# Altium PCB power.PcbDoc (part 2 of 2)
Units mil, origin at the board's own origin, x right, y up, seen from the top; angles counter-clockwise.
Board outline 6000 x 4000 mil, 2 copper layers (Top Layer, Bottom Layer); 144 components, 0 nets, 936 pads, 0 vias.
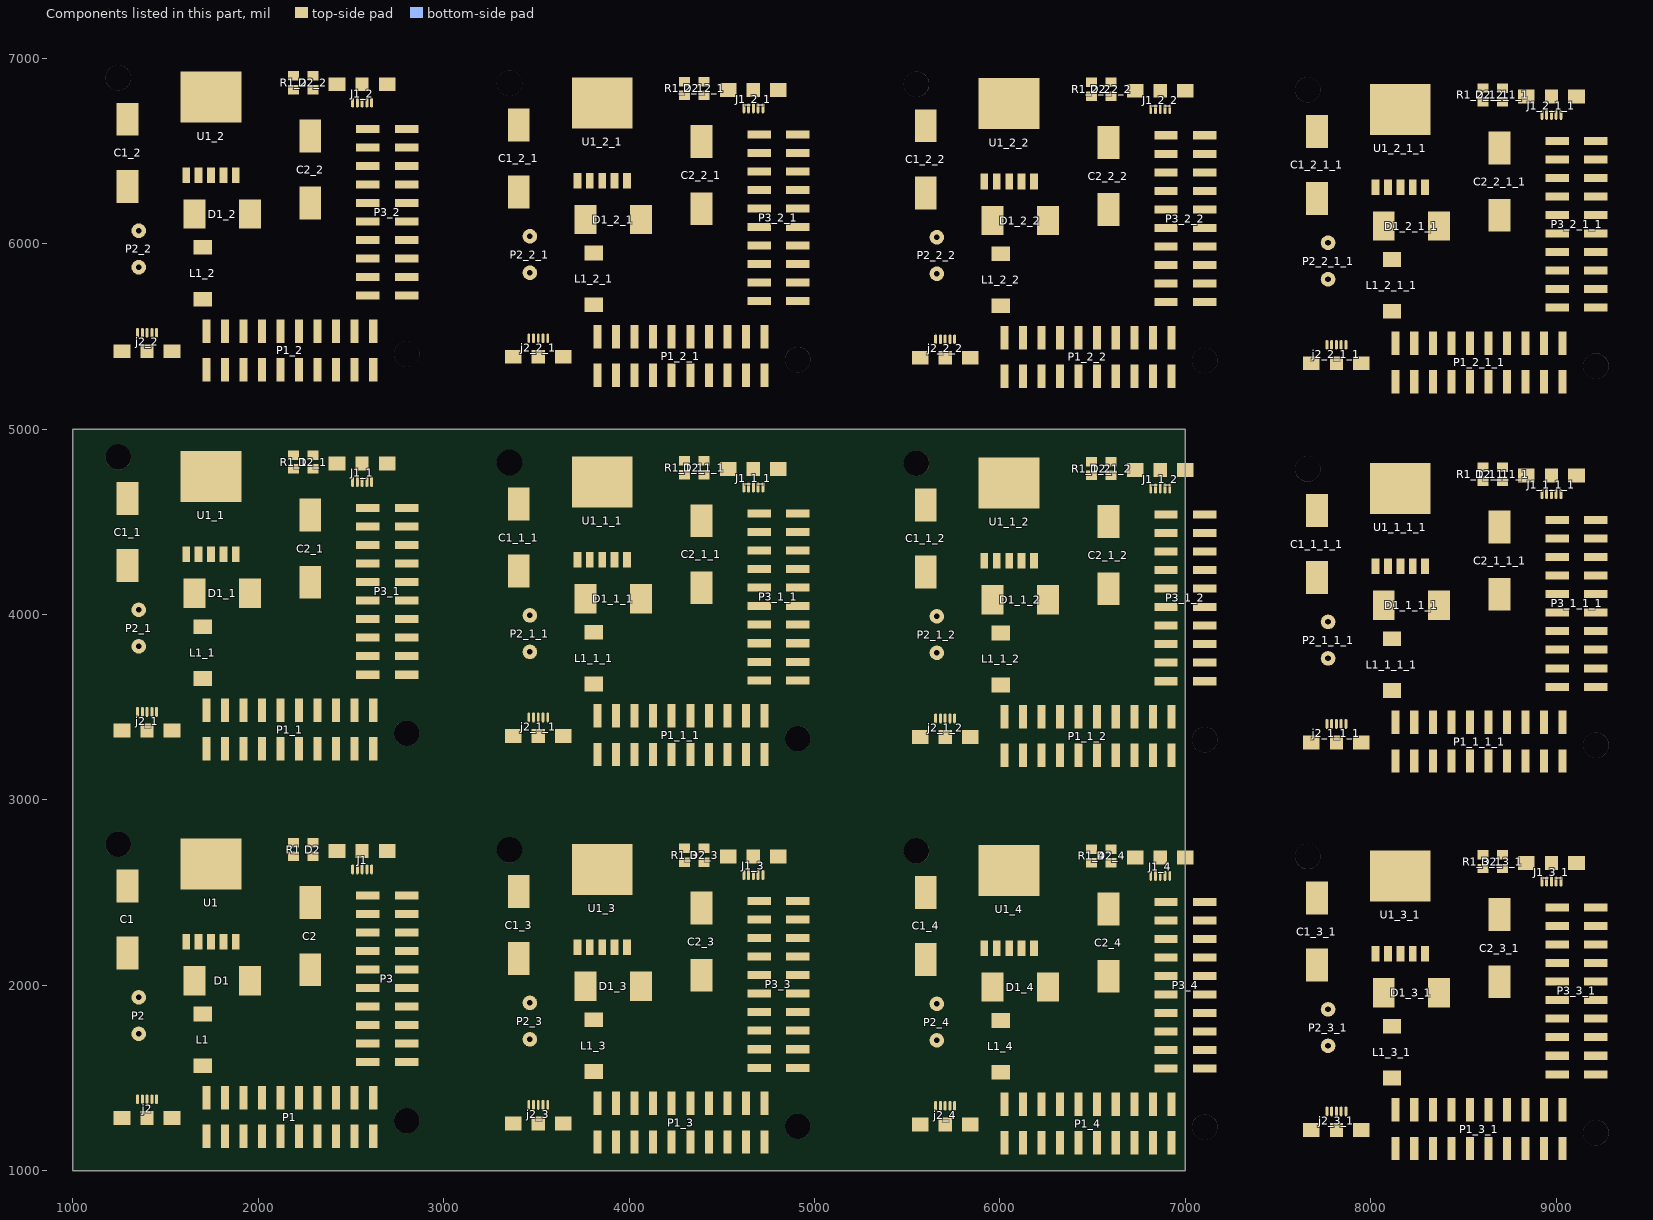
[diagram p2: the components of this part, seen from the top]

## Nets (pads, with @x,y where several pads share a name; then routed paths per layer and width w, separated by ;. In a path a pad name is that pad's centre, name@x,y a point inside that pad or via, vN(x,y) a via of type N, cw(c..) or ccw(c..) an arc to the next point about the centre after c; other vN are vias at no path point) (continued)
copper on no net: | length 249239
  Top Layer w19.68: 1075,2900 1075,1075 2925,1075 2925,2905 1080,2905 ; 1075,4990 1075,3165 2925,3165 2925,4995 1080,4995 ; 1075,7035 1075,5210 2925,5210 2925,7040 1080,7040 ; 1635.39,2005 1655.39,2025 1678.07,2047.68 ; 1635.39,4095 1655.39,4115 1678.07,4137.68 ; 1635.39,6140 1655.39,6160 1678.07,6182.68 ; 3185,2870 3185,1045 5035,1045 5035,2875 3190,2875 ; 3185,4960 3185,3135 5035,3135 5035,4965 3190,4965 ; 3185,7005 3185,5180 5035,5180 5035,7010 3190,7010 ; 3745.39,1975 3765.39,1995 3788.07,2017.68 ; 3745.39,4065 3765.39,4085 3788.07,4107.68 ; 3745.39,6110 3765.39,6130 3788.07,6152.68 ; 5380,2865 5380,1040 7230,1040 7230,2870 5385,2870 ; 5380,4955 5380,3130 7230,3130 7230,4960 5385,4960 ; 5380,7000 5380,5175 7230,5175 7230,7005 5385,7005 ; 5940.39,1970 5960.39,1990 5983.07,2012.68 ; 5940.39,4060 5960.39,4080 5983.07,4102.68 ; 5940.39,6105 5960.39,6125 5983.07,6147.68 ; 7490,2835 7490,1010 9340,1010 9340,2840 7495,2840 ; 7490,4925 7490,3100 9340,3100 9340,4930 7495,4930 ; 7490,6970 7490,5145 9340,5145 9340,6975 7495,6975 ; 8050.39,1940 8070.39,1960 8093.07,1982.68 ; 8050.39,4030 8070.39,4050 8093.07,4072.68 ; 8050.39,6075 8070.39,6095 8093.07,6117.68
  Top Layer w23.62: 1308.82,1425 1348.82,1385 ; 1308.82,3515 1348.82,3475 ; 1308.82,5560 1348.82,5520 ; 2619.21,2625 2760,2625 ; 2619.21,4715 2760,4715 ; 2619.21,6760 2760,6760 ; 3418.82,1395 3458.82,1355 ; 3418.82,3485 3458.82,3445 ; 3418.82,5530 3458.82,5490 ; 4729.21,2595 4870,2595 ; 4729.21,4685 4870,4685 ; 4729.21,6730 4870,6730 ; 5613.82,1390 5653.82,1350 ; 5613.82,3480 5653.82,3440 ; 5613.82,5525 5653.82,5485 ; 6924.21,2590 7065,2590 ; 6924.21,4680 7065,4680 ; 6924.21,6725 7065,6725 ; 7723.82,1360 7763.82,1320 ; 7723.82,3450 7763.82,3410 ; 7723.82,5495 7763.82,5455 ; 9034.21,2560 9175,2560 ; 9034.21,4650 9175,4650 ; 9034.21,6695 9175,6695
  Top Layer w27.56: 1300,2173.9 1300,2223.9 ; 1300,4263.9 1300,4313.9 ; 1300,6308.9 1300,6358.9 ; 1600.18,2223.9 1611.14,2234.86 ; 1600.18,4313.9 1611.14,4324.86 ; 1600.18,6358.9 1611.14,6369.86 ; 1678.07,2047.68 1678.07,2234.86 ; 1678.07,4137.68 1678.07,4324.86 ; 1678.07,6182.68 1678.07,6369.86 ; 3410,2143.9 3410,2193.9 ; 3410,4233.9 3410,4283.9 ; 3410,6278.9 3410,6328.9 ; 3710.18,2193.9 3721.14,2204.86 ; 3710.18,4283.9 3721.14,4294.86 ; 3710.18,6328.9 3721.14,6339.86 ; 3788.07,2017.68 3788.07,2204.86 ; 3788.07,4107.68 3788.07,4294.86 ; 3788.07,6152.68 3788.07,6339.86 ; 5605,2138.9 5605,2188.9 ; 5605,4228.9 5605,4278.9 ; 5605,6273.9 5605,6323.9 ; 5905.18,2188.9 5916.14,2199.86 ; 5905.18,4278.9 5916.14,4289.86 ; 5905.18,6323.9 5916.14,6334.86 ; 5983.07,2012.68 5983.07,2199.86 ; 5983.07,4102.68 5983.07,4289.86 ; 5983.07,6147.68 5983.07,6334.86 ; 7715,2108.9 7715,2158.9 ; 7715,4198.9 7715,4248.9 ; 7715,6243.9 7715,6293.9 ; 8015.18,2158.9 8026.14,2169.86 ; 8015.18,4248.9 8026.14,4259.86 ; 8015.18,6293.9 8026.14,6304.86 ; 8093.07,1982.68 8093.07,2169.86 ; 8093.07,4072.68 8093.07,4259.86 ; 8093.07,6117.68 8093.07,6304.86
  Top Layer w31.5: 1165,1410 1165,1150 1185,1130 1580,1130 1635,1185 1720,1185 1820,1185 1920,1185 2020,1185 2120,1185 2220,1185 2320,1185 2420,1185 2520,1185 2620,1185 2680,1245 2680,1325 2800,1445 2800,1585 2800,1685 2800,1785 2800,1885 2800,1985 2800,2085 2800,2185 2800,2285 2800,2385 2800,2485 2800,2585 ; 1165,3500 1165,3240 1185,3220 1580,3220 1635,3275 1720,3275 1820,3275 1920,3275 2020,3275 2120,3275 2220,3275 2320,3275 2420,3275 2520,3275 2620,3275 2680,3335 2680,3415 2800,3535 2800,3675 2800,3775 2800,3875 2800,3975 2800,4075 2800,4175 2800,4275 2800,4375 2800,4475 2800,4575 2800,4675 ; 1165,5545 1165,5285 1185,5265 1580,5265 1635,5320 1720,5320 1820,5320 1920,5320 2020,5320 2120,5320 2220,5320 2320,5320 2420,5320 2520,5320 2620,5320 2680,5380 2680,5460 2800,5580 2800,5720 2800,5820 2800,5920 2800,6020 2800,6120 2800,6220 2800,6320 2800,6420 2800,6520 2800,6620 2800,6720 ; 1180,1425 1308.82,1425 ; 1180,2466.1 1300,2586.1 1305.75,2586.1 ; 1180,3515 1308.82,3515 ; 1180,4556.1 1300,4676.1 1305.75,4676.1 ; 1180,5560 1308.82,5560 ; 1180,6601.1 1300,6721.1 1305.75,6721.1 ; 1459.21,1385 1467.87,1393.66 1720,1393.66 1820,1393.66 1920,1393.66 2020,1393.66 2120,1393.66 2220,1393.66 2320,1393.66 2420,1393.66 2520,1393.66 2620,1393.66 ; 1459.21,3475 1467.87,3483.66 1720,3483.66 1820,3483.66 1920,3483.66 2020,3483.66 2120,3483.66 2220,3483.66 2320,3483.66 2420,3483.66 2520,3483.66 2620,3483.66 ; 1459.21,5520 1467.87,5528.66 1720,5528.66 1820,5528.66 1920,5528.66 2020,5528.66 2120,5528.66 2220,5528.66 2320,5528.66 2420,5528.66 2520,5528.66 2620,5528.66 ; 1655.39,2025 1700,1980.39 ; 1655.39,4115 1700,4070.39 ; 1655.39,6160 1700,6115.39 ; 1745.2,2234.86 1745.2,2174.8 1895,2025 1954.61,2025 ; 1745.2,4324.86 1745.2,4264.8 1895,4115 1954.61,4115 ; 1745.2,6369.86 1745.2,6309.8 1895,6160 1954.61,6160 ; 1878.86,2234.86 1954.61,2159.11 1954.61,2025 ; 1878.86,4324.86 1954.61,4249.11 1954.61,4115 ; 1878.86,6369.86 1954.61,6294.11 1954.61,6160 ; 2013.5,2083.9 1954.61,2025 ; 2013.5,4173.9 1954.61,4115 ; 2013.5,6218.9 1954.61,6160 ; 2125,2580 2500.79,2580 ; 2125,4670 2500.79,4670 ; 2125,6715 2500.79,6715 ; 2395.39,2850 2409.05,2863.66 2721.34,2863.66 2800,2785 2800,2585 ; 2395.39,4940 2409.05,4953.66 2721.34,4953.66 2800,4875 2800,4675 ; 2395.39,6985 2409.05,6998.66 2721.34,6998.66 2800,6920 2800,6720 ; 2500.79,2625 2500.79,2580 ; 2500.79,4715 2500.79,4670 ; 2500.79,6760 2500.79,6715 ; 2590.24,2083.9 2591.34,2085 ; 2590.24,4173.9 2591.34,4175 ; 2590.24,6218.9 2591.34,6220 ; 2591.34,1422.32 2591.34,1585 2591.34,1685 2591.34,1785 2591.34,1885 2591.34,1985 2591.34,2085 ; 2591.34,3512.32 2591.34,3675 2591.34,3775 2591.34,3875 2591.34,3975 2591.34,4075 2591.34,4175 ; 2591.34,5557.32 2591.34,5720 2591.34,5820 2591.34,5920 2591.34,6020 2591.34,6120 2591.34,6220 ; 2760,2625 2800,2585 ; 2760,4715 2800,4675 ; 2760,6760 2800,6720 ; 3275,1380 3275,1120 3295,1100 3690,1100 3745,1155 3830,1155 3930,1155 4030,1155 4130,1155 4230,1155 4330,1155 4430,1155 4530,1155 4630,1155 4730,1155 4790,1215 4790,1295 4910,1415 4910,1555 4910,1655 4910,1755 4910,1855 4910,1955 4910,2055 4910,2155 4910,2255 4910,2355 4910,2455 4910,2555 ; 3275,3470 3275,3210 3295,3190 3690,3190 3745,3245 3830,3245 3930,3245 4030,3245 4130,3245 4230,3245 4330,3245 4430,3245 4530,3245 4630,3245 4730,3245 4790,3305 4790,3385 4910,3505 4910,3645 4910,3745 4910,3845 4910,3945 4910,4045 4910,4145 4910,4245 4910,4345 4910,4445 4910,4545 4910,4645 ; 3275,5515 3275,5255 3295,5235 3690,5235 3745,5290 3830,5290 3930,5290 4030,5290 4130,5290 4230,5290 4330,5290 4430,5290 4530,5290 4630,5290 4730,5290 4790,5350 4790,5430 4910,5550 4910,5690 4910,5790 4910,5890 4910,5990 4910,6090 4910,6190 4910,6290 4910,6390 4910,6490 4910,6590 4910,6690 ; 3290,1395 3418.82,1395 ; 3290,2436.1 3410,2556.1 3415.75,2556.1 ; 3290,3485 3418.82,3485 ; 3290,4526.1 3410,4646.1 3415.75,4646.1 ; 3290,5530 3418.82,5530 ; 3290,6571.1 3410,6691.1 3415.75,6691.1 ; 3569.21,1355 3577.87,1363.66 3830,1363.66 3930,1363.66 4030,1363.66 4130,1363.66 4230,1363.66 4330,1363.66 4430,1363.66 4530,1363.66 4630,1363.66 4730,1363.66 ; 3569.21,3445 3577.87,3453.66 3830,3453.66 3930,3453.66 4030,3453.66 4130,3453.66 4230,3453.66 4330,3453.66 4430,3453.66 4530,3453.66 4630,3453.66 4730,3453.66 ; 3569.21,5490 3577.87,5498.66 3830,5498.66 3930,5498.66 4030,5498.66 4130,5498.66 4230,5498.66 4330,5498.66 4430,5498.66 4530,5498.66 4630,5498.66 4730,5498.66 ; 3765.39,1995 3810,1950.39 ; 3765.39,4085 3810,4040.39 ; 3765.39,6130 3810,6085.39 ; 3855.2,2204.86 3855.2,2144.8 4005,1995 4064.61,1995 ; 3855.2,4294.86 3855.2,4234.8 4005,4085 4064.61,4085 ; 3855.2,6339.86 3855.2,6279.8 4005,6130 4064.61,6130 ; 3988.86,2204.86 4064.61,2129.11 4064.61,1995 ; 3988.86,4294.86 4064.61,4219.11 4064.61,4085 ; 3988.86,6339.86 4064.61,6264.11 4064.61,6130 ; 4123.5,2053.9 4064.61,1995 ; 4123.5,4143.9 4064.61,4085 ; 4123.5,6188.9 4064.61,6130 ; 4235,2550 4610.79,2550 ; 4235,4640 4610.79,4640 ; 4235,6685 4610.79,6685 ; 4505.39,2820 4519.05,2833.66 4831.34,2833.66 4910,2755 4910,2555 ; 4505.39,4910 4519.05,4923.66 4831.34,4923.66 4910,4845 4910,4645 ; 4505.39,6955 4519.05,6968.66 4831.34,6968.66 4910,6890 4910,6690 ; 4610.79,2595 4610.79,2550 ; 4610.79,4685 4610.79,4640 ; 4610.79,6730 4610.79,6685 ; 4700.24,2053.9 4701.34,2055 ; 4700.24,4143.9 4701.34,4145 ; 4700.24,6188.9 4701.34,6190 ; 4701.34,1392.32 4701.34,1555 4701.34,1655 4701.34,1755 4701.34,1855 4701.34,1955 4701.34,2055 ; 4701.34,3482.32 4701.34,3645 4701.34,3745 4701.34,3845 4701.34,3945 4701.34,4045 4701.34,4145 ; 4701.34,5527.32 4701.34,5690 4701.34,5790 4701.34,5890 4701.34,5990 4701.34,6090 4701.34,6190 ; 4870,2595 4910,2555 ; 4870,4685 4910,4645 ; 4870,6730 4910,6690 ; 5470,1375 5470,1115 5490,1095 5885,1095 5940,1150 6025,1150 6125,1150 6225,1150 6325,1150 6425,1150 6525,1150 6625,1150 6725,1150 6825,1150 6925,1150 6985,1210 6985,1290 7105,1410 7105,1550 7105,1650 7105,1750 7105,1850 7105,1950 7105,2050 7105,2150 7105,2250 7105,2350 7105,2450 7105,2550 ; 5470,3465 5470,3205 5490,3185 5885,3185 5940,3240 6025,3240 6125,3240 6225,3240 6325,3240 6425,3240 6525,3240 6625,3240 6725,3240 6825,3240 6925,3240 6985,3300 6985,3380 7105,3500 7105,3640 7105,3740 7105,3840 7105,3940 7105,4040 7105,4140 7105,4240 7105,4340 7105,4440 7105,4540 7105,4640 ; 5470,5510 5470,5250 5490,5230 5885,5230 5940,5285 6025,5285 6125,5285 6225,5285 6325,5285 6425,5285 6525,5285 6625,5285 6725,5285 6825,5285 6925,5285 6985,5345 6985,5425 7105,5545 7105,5685 7105,5785 7105,5885 7105,5985 7105,6085 7105,6185 7105,6285 7105,6385 7105,6485 7105,6585 7105,6685 ; 5485,1390 5613.82,1390 ; 5485,2431.1 5605,2551.1 5610.75,2551.1 ; 5485,3480 5613.82,3480 ; 5485,4521.1 5605,4641.1 5610.75,4641.1 ; 5485,5525 5613.82,5525 ; 5485,6566.1 5605,6686.1 5610.75,6686.1 ; 5764.21,1350 5772.87,1358.66 6025,1358.66 6125,1358.66 6225,1358.66 6325,1358.66 6425,1358.66 6525,1358.66 6625,1358.66 6725,1358.66 6825,1358.66 6925,1358.66 ; 5764.21,3440 5772.87,3448.66 6025,3448.66 6125,3448.66 6225,3448.66 6325,3448.66 6425,3448.66 6525,3448.66 6625,3448.66 6725,3448.66 6825,3448.66 6925,3448.66 ; 5764.21,5485 5772.87,5493.66 6025,5493.66 6125,5493.66 6225,5493.66 6325,5493.66 6425,5493.66 6525,5493.66 6625,5493.66 6725,5493.66 6825,5493.66 6925,5493.66 ; 5960.39,1990 6005,1945.39 ; 5960.39,4080 6005,4035.39 ; 5960.39,6125 6005,6080.39 ; 6050.2,2199.86 6050.2,2139.8 6200,1990 6259.61,1990 ; 6050.2,4289.86 6050.2,4229.8 6200,4080 6259.61,4080 ; 6050.2,6334.86 6050.2,6274.8 6200,6125 6259.61,6125 ; 6183.86,2199.86 6259.61,2124.11 6259.61,1990 ; 6183.86,4289.86 6259.61,4214.11 6259.61,4080 ; 6183.86,6334.86 6259.61,6259.11 6259.61,6125 ; 6318.5,2048.9 6259.61,1990 ; 6318.5,4138.9 6259.61,4080 ; 6318.5,6183.9 6259.61,6125 ; 6430,2545 6805.79,2545 ; 6430,4635 6805.79,4635 ; 6430,6680 6805.79,6680 ; 6700.39,2815 6714.05,2828.66 7026.34,2828.66 7105,2750 7105,2550 ; 6700.39,4905 6714.05,4918.66 7026.34,4918.66 7105,4840 7105,4640 ; 6700.39,6950 6714.05,6963.66 7026.34,6963.66 7105,6885 7105,6685 ; 6805.79,2590 6805.79,2545 ; 6805.79,4680 6805.79,4635 ; 6805.79,6725 6805.79,6680 ; 6895.24,2048.9 6896.34,2050 ; 6895.24,4138.9 6896.34,4140 ; 6895.24,6183.9 6896.34,6185 ; 6896.34,1387.32 6896.34,1550 6896.34,1650 6896.34,1750 6896.34,1850 6896.34,1950 6896.34,2050 ; 6896.34,3477.32 6896.34,3640 6896.34,3740 6896.34,3840 6896.34,3940 6896.34,4040 6896.34,4140 ; 6896.34,5522.32 6896.34,5685 6896.34,5785 6896.34,5885 6896.34,5985 6896.34,6085 6896.34,6185 ; 7065,2590 7105,2550 ; 7065,4680 7105,4640 ; 7065,6725 7105,6685 ; 7580,1345 7580,1085 7600,1065 7995,1065 8050,1120 8135,1120 8235,1120 8335,1120 8435,1120 8535,1120 8635,1120 8735,1120 8835,1120 8935,1120 9035,1120 9095,1180 9095,1260 9215,1380 9215,1520 9215,1620 9215,1720 9215,1820 9215,1920 9215,2020 9215,2120 9215,2220 9215,2320 9215,2420 9215,2520 ; 7580,3435 7580,3175 7600,3155 7995,3155 8050,3210 8135,3210 8235,3210 8335,3210 8435,3210 8535,3210 8635,3210 8735,3210 8835,3210 8935,3210 9035,3210 9095,3270 9095,3350 9215,3470 9215,3610 9215,3710 9215,3810 9215,3910 9215,4010 9215,4110 9215,4210 9215,4310 9215,4410 9215,4510 9215,4610 ; 7580,5480 7580,5220 7600,5200 7995,5200 8050,5255 8135,5255 8235,5255 8335,5255 8435,5255 8535,5255 8635,5255 8735,5255 8835,5255 8935,5255 9035,5255 9095,5315 9095,5395 9215,5515 9215,5655 9215,5755 9215,5855 9215,5955 9215,6055 9215,6155 9215,6255 9215,6355 9215,6455 9215,6555 9215,6655 ; 7595,1360 7723.82,1360 ; 7595,2401.1 7715,2521.1 7720.75,2521.1 ; 7595,3450 7723.82,3450 ; 7595,4491.1 7715,4611.1 7720.75,4611.1 ; 7595,5495 7723.82,5495 ; 7595,6536.1 7715,6656.1 7720.75,6656.1 ; 7874.21,1320 7882.87,1328.66 8135,1328.66 8235,1328.66 8335,1328.66 8435,1328.66 8535,1328.66 8635,1328.66 8735,1328.66 8835,1328.66 8935,1328.66 9035,1328.66 ; 7874.21,3410 7882.87,3418.66 8135,3418.66 8235,3418.66 8335,3418.66 8435,3418.66 8535,3418.66 8635,3418.66 8735,3418.66 8835,3418.66 8935,3418.66 9035,3418.66 ; 7874.21,5455 7882.87,5463.66 8135,5463.66 8235,5463.66 8335,5463.66 8435,5463.66 8535,5463.66 8635,5463.66 8735,5463.66 8835,5463.66 8935,5463.66 9035,5463.66 ; 8070.39,1960 8115,1915.39 ; 8070.39,4050 8115,4005.39 ; 8070.39,6095 8115,6050.39 ; 8160.2,2169.86 8160.2,2109.8 8310,1960 8369.61,1960 ; 8160.2,4259.86 8160.2,4199.8 8310,4050 8369.61,4050 ; 8160.2,6304.86 8160.2,6244.8 8310,6095 8369.61,6095 ; 8293.86,2169.86 8369.61,2094.11 8369.61,1960 ; 8293.86,4259.86 8369.61,4184.11 8369.61,4050 ; 8293.86,6304.86 8369.61,6229.11 8369.61,6095 ; 8428.5,2018.9 8369.61,1960 ; 8428.5,4108.9 8369.61,4050 ; 8428.5,6153.9 8369.61,6095 ; 8540,2515 8915.79,2515 ; 8540,4605 8915.79,4605 ; 8540,6650 8915.79,6650 ; 8810.39,2785 8824.05,2798.66 9136.34,2798.66 9215,2720 9215,2520 ; 8810.39,4875 8824.05,4888.66 9136.34,4888.66 9215,4810 9215,4610 ; 8810.39,6920 8824.05,6933.66 9136.34,6933.66 9215,6855 9215,6655 ; 8915.79,2560 8915.79,2515 ; 8915.79,4650 8915.79,4605 ; 8915.79,6695 8915.79,6650 ; 9005.24,2018.9 9006.34,2020 ; 9005.24,4108.9 9006.34,4110 ; 9005.24,6153.9 9006.34,6155 ; 9006.34,1357.32 9006.34,1520 9006.34,1620 9006.34,1720 9006.34,1820 9006.34,1920 9006.34,2020 ; 9006.34,3447.32 9006.34,3610 9006.34,3710 9006.34,3810 9006.34,3910 9006.34,4010 9006.34,4110 ; 9006.34,5492.32 9006.34,5655 9006.34,5755 9006.34,5855 9006.34,5955 9006.34,6055 9006.34,6155 ; 9175,2560 9215,2520 ; 9175,4650 9215,4610 ; 9175,6695 9215,6655 ; 2500.79,2580 2500.79,2534.21 2550,2485 2591.34,2485 2591.34,2385 2591.34,2285 2591.34,2185 2591.34,2085 ; 2500.79,4670 2500.79,4624.21 2550,4575 2591.34,4575 2591.34,4475 2591.34,4375 2591.34,4275 2591.34,4175 ; 2500.79,6715 2500.79,6669.21 2550,6620 2591.34,6620 2591.34,6520 2591.34,6420 2591.34,6320 2591.34,6220 ; 4610.79,2550 4610.79,2504.21 4660,2455 4701.34,2455 4701.34,2355 4701.34,2255 4701.34,2155 4701.34,2055 ; 4610.79,4640 4610.79,4594.21 4660,4545 4701.34,4545 4701.34,4445 4701.34,4345 4701.34,4245 4701.34,4145 ; 4610.79,6685 4610.79,6639.21 4660,6590 4701.34,6590 4701.34,6490 4701.34,6390 4701.34,6290 4701.34,6190 ; 6805.79,2545 6805.79,2499.21 6855,2450 6896.34,2450 6896.34,2350 6896.34,2250 6896.34,2150 6896.34,2050 ; 6805.79,4635 6805.79,4589.21 6855,4540 6896.34,4540 6896.34,4440 6896.34,4340 6896.34,4240 6896.34,4140 ; 6805.79,6680 6805.79,6634.21 6855,6585 6896.34,6585 6896.34,6485 6896.34,6385 6896.34,6285 6896.34,6185 ; 8915.79,2515 8915.79,2469.21 8965,2420 9006.34,2420 9006.34,2320 9006.34,2220 9006.34,2120 9006.34,2020 ; 8915.79,4605 8915.79,4559.21 8965,4510 9006.34,4510 9006.34,4410 9006.34,4310 9006.34,4210 9006.34,4110 ; 8915.79,6650 8915.79,6604.21 8965,6555 9006.34,6555 9006.34,6455 9006.34,6355 9006.34,6255 9006.34,6155
  Top Layer w39.37: 1165,1410 1180,1425 1320,1565 1700,1565 ; 1165,3500 1180,3515 1320,3655 1700,3655 ; 1165,5545 1180,5560 1320,5700 1700,5700 ; 1180,2466.1 1180,1988.15 1360,1808.15 1360,1743.15 ; 1180,4556.1 1180,4078.15 1360,3898.15 1360,3833.15 ; 1180,6601.1 1180,6123.15 1360,5943.15 1360,5878.15 ; 1305.75,2586.1 1461.85,2430 1715,2430 1745.2,2399.8 1745.2,2234.86 ; 1305.75,4676.1 1461.85,4520 1715,4520 1745.2,4489.8 1745.2,4324.86 ; 1305.75,6721.1 1461.85,6565 1715,6565 1745.2,6534.8 1745.2,6369.86 ; 1811.93,2234.86 1811.93,2396.93 1861.1,2446.1 2030,2446.1 2025,2451.1 2025,2810 2065,2850 2315,2850 ; 1811.93,4324.86 1811.93,4486.93 1861.1,4536.1 2030,4536.1 2025,4541.1 2025,4900 2065,4940 2315,4940 ; 1811.93,6369.86 1811.93,6531.93 1861.1,6581.1 2030,6581.1 2025,6586.1 2025,6945 2065,6985 2315,6985 ; 2013.5,2083.9 2280,2083.9 2590.24,2083.9 ; 2013.5,4173.9 2280,4173.9 2590.24,4173.9 ; 2013.5,6218.9 2280,6218.9 2590.24,6218.9 ; 2125,2580 2095,2610 2095,2755 2109.8,2769.8 2190,2769.8 ; 2125,4670 2095,4700 2095,4845 2109.8,4859.8 2190,4859.8 ; 2125,6715 2095,6745 2095,6890 2109.8,6904.8 2190,6904.8 ; 2190,2695 2295,2695 ; 2190,4785 2295,4785 ; 2190,6830 2295,6830 ; 2295,2769.8 2315,2789.8 2315,2850 ; 2295,4859.8 2315,4879.8 2315,4940 ; 2295,6904.8 2315,6924.8 2315,6985 ; 2395.39,2850 2315,2850 ; 2395.39,4940 2315,4940 ; 2395.39,6985 2315,6985 ; 3275,1380 3290,1395 3430,1535 3810,1535 ; 3275,3470 3290,3485 3430,3625 3810,3625 ; 3275,5515 3290,5530 3430,5670 3810,5670 ; 3290,2436.1 3290,1958.15 3470,1778.15 3470,1713.15 ; 3290,4526.1 3290,4048.15 3470,3868.15 3470,3803.15 ; 3290,6571.1 3290,6093.15 3470,5913.15 3470,5848.15 ; 3415.75,2556.1 3571.85,2400 3825,2400 3855.2,2369.8 3855.2,2204.86 ; 3415.75,4646.1 3571.85,4490 3825,4490 3855.2,4459.8 3855.2,4294.86 ; 3415.75,6691.1 3571.85,6535 3825,6535 3855.2,6504.8 3855.2,6339.86 ; 3921.93,2204.86 3921.93,2366.93 3971.1,2416.1 4140,2416.1 4135,2421.1 4135,2780 4175,2820 4425,2820 ; 3921.93,4294.86 3921.93,4456.93 3971.1,4506.1 4140,4506.1 4135,4511.1 4135,4870 4175,4910 4425,4910 ; 3921.93,6339.86 3921.93,6501.93 3971.1,6551.1 4140,6551.1 4135,6556.1 4135,6915 4175,6955 4425,6955 ; 4123.5,2053.9 4390,2053.9 4700.24,2053.9 ; 4123.5,4143.9 4390,4143.9 4700.24,4143.9 ; 4123.5,6188.9 4390,6188.9 4700.24,6188.9 ; 4235,2550 4205,2580 4205,2725 4219.8,2739.8 4300,2739.8 ; 4235,4640 4205,4670 4205,4815 4219.8,4829.8 4300,4829.8 ; 4235,6685 4205,6715 4205,6860 4219.8,6874.8 4300,6874.8 ; 4300,2665 4405,2665 ; 4300,4755 4405,4755 ; 4300,6800 4405,6800 ; 4405,2739.8 4425,2759.8 4425,2820 ; 4405,4829.8 4425,4849.8 4425,4910 ; 4405,6874.8 4425,6894.8 4425,6955 ; 4505.39,2820 4425,2820 ; 4505.39,4910 4425,4910 ; 4505.39,6955 4425,6955 ; 5470,1375 5485,1390 5625,1530 6005,1530 ; 5470,3465 5485,3480 5625,3620 6005,3620 ; 5470,5510 5485,5525 5625,5665 6005,5665 ; 5485,2431.1 5485,1953.15 5665,1773.15 5665,1708.15 ; 5485,4521.1 5485,4043.15 5665,3863.15 5665,3798.15 ; 5485,6566.1 5485,6088.15 5665,5908.15 5665,5843.15 ; 5610.75,2551.1 5766.85,2395 6020,2395 6050.2,2364.8 6050.2,2199.86 ; 5610.75,4641.1 5766.85,4485 6020,4485 6050.2,4454.8 6050.2,4289.86 ; 5610.75,6686.1 5766.85,6530 6020,6530 6050.2,6499.8 6050.2,6334.86 ; 6116.93,2199.86 6116.93,2361.93 6166.1,2411.1 6335,2411.1 6330,2416.1 6330,2775 6370,2815 6620,2815 ; 6116.93,4289.86 6116.93,4451.93 6166.1,4501.1 6335,4501.1 6330,4506.1 6330,4865 6370,4905 6620,4905 ; 6116.93,6334.86 6116.93,6496.93 6166.1,6546.1 6335,6546.1 6330,6551.1 6330,6910 6370,6950 6620,6950 ; 6318.5,2048.9 6585,2048.9 6895.24,2048.9 ; 6318.5,4138.9 6585,4138.9 6895.24,4138.9 ; 6318.5,6183.9 6585,6183.9 6895.24,6183.9 ; 6430,2545 6400,2575 6400,2720 6414.8,2734.8 6495,2734.8 ; 6430,4635 6400,4665 6400,4810 6414.8,4824.8 6495,4824.8 ; 6430,6680 6400,6710 6400,6855 6414.8,6869.8 6495,6869.8 ; 6495,2660 6600,2660 ; 6495,4750 6600,4750 ; 6495,6795 6600,6795 ; 6600,2734.8 6620,2754.8 6620,2815 ; 6600,4824.8 6620,4844.8 6620,4905 ; 6600,6869.8 6620,6889.8 6620,6950 ; 6700.39,2815 6620,2815 ; 6700.39,4905 6620,4905 ; 6700.39,6950 6620,6950 ; 7580,1345 7595,1360 7735,1500 8115,1500 ; 7580,3435 7595,3450 7735,3590 8115,3590 ; 7580,5480 7595,5495 7735,5635 8115,5635 ; 7595,2401.1 7595,1923.15 7775,1743.15 7775,1678.15 ; 7595,4491.1 7595,4013.15 7775,3833.15 7775,3768.15 ; 7595,6536.1 7595,6058.15 7775,5878.15 7775,5813.15 ; 7720.75,2521.1 7876.85,2365 8130,2365 8160.2,2334.8 8160.2,2169.86 ; 7720.75,4611.1 7876.85,4455 8130,4455 8160.2,4424.8 8160.2,4259.86 ; 7720.75,6656.1 7876.85,6500 8130,6500 8160.2,6469.8 8160.2,6304.86 ; 8226.93,2169.86 8226.93,2331.93 8276.1,2381.1 8445,2381.1 8440,2386.1 8440,2745 8480,2785 8730,2785 ; 8226.93,4259.86 8226.93,4421.93 8276.1,4471.1 8445,4471.1 8440,4476.1 8440,4835 8480,4875 8730,4875 ; 8226.93,6304.86 8226.93,6466.93 8276.1,6516.1 8445,6516.1 8440,6521.1 8440,6880 8480,6920 8730,6920 ; 8428.5,2018.9 8695,2018.9 9005.24,2018.9 ; 8428.5,4108.9 8695,4108.9 9005.24,4108.9 ; 8428.5,6153.9 8695,6153.9 9005.24,6153.9 ; 8540,2515 8510,2545 8510,2690 8524.8,2704.8 8605,2704.8 ; 8540,4605 8510,4635 8510,4780 8524.8,4794.8 8605,4794.8 ; 8540,6650 8510,6680 8510,6825 8524.8,6839.8 8605,6839.8 ; 8605,2630 8710,2630 ; 8605,4720 8710,4720 ; 8605,6765 8710,6765 ; 8710,2704.8 8730,2724.8 8730,2785 ; 8710,4794.8 8730,4814.8 8730,4875 ; 8710,6839.8 8730,6859.8 8730,6920 ; 8810.39,2785 8730,2785 ; 8810.39,4875 8730,4875 ; 8810.39,6920 8730,6920
  Top Layer w59.06: 1300,2223.9 1600.18,2223.9 ; 1300,4313.9 1600.18,4313.9 ; 1300,6358.9 1600.18,6358.9 ; 1355,1935 1355,2118.9 ; 1355,4025 1355,4208.9 ; 1355,6070 1355,6253.9 ; 3410,2193.9 3710.18,2193.9 ; 3410,4283.9 3710.18,4283.9 ; 3410,6328.9 3710.18,6328.9 ; 3465,1905 3465,2088.9 ; 3465,3995 3465,4178.9 ; 3465,6040 3465,6223.9 ; 5605,2188.9 5905.18,2188.9 ; 5605,4278.9 5905.18,4278.9 ; 5605,6323.9 5905.18,6323.9 ; 5660,1900 5660,2083.9 ; 5660,3990 5660,4173.9 ; 5660,6035 5660,6218.9 ; 7715,2158.9 8015.18,2158.9 ; 7715,4248.9 8015.18,4248.9 ; 7715,6293.9 8015.18,6293.9 ; 7770,1870 7770,2053.9 ; 7770,3960 7770,4143.9 ; 7770,6005 7770,6188.9
  Top Layer w78.74: 1700,1845 1700,1980.39 ; 1700,3935 1700,4070.39 ; 1700,5980 1700,6115.39 ; 2030,2446.1 2280,2446.1 ; 2030,4536.1 2280,4536.1 ; 2030,6581.1 2280,6581.1 ; 3810,1815 3810,1950.39 ; 3810,3905 3810,4040.39 ; 3810,5950 3810,6085.39 ; 4140,2416.1 4390,2416.1 ; 4140,4506.1 4390,4506.1 ; 4140,6551.1 4390,6551.1 ; 6005,1810 6005,1945.39 ; 6005,3900 6005,4035.39 ; 6005,5945 6005,6080.39 ; 6335,2411.1 6585,2411.1 ; 6335,4501.1 6585,4501.1 ; 6335,6546.1 6585,6546.1 ; 8115,1780 8115,1915.39 ; 8115,3870 8115,4005.39 ; 8115,5915 8115,6050.39 ; 8445,2381.1 8695,2381.1 ; 8445,4471.1 8695,4471.1 ; 8445,6516.1 8695,6516.1

## Other copper
Top Layer:
  pour cut-out: 7033.11,1235 ccw(c7102.05,1235) 7102.05,1166.06 ccw(c7102.05,1235) 7170.98,1235 ccw(c7102.05,1235) 7102.05,1303.94 ccw(c7102.05,1235)
  pour cut-out: 5550,2656.1 cw(c5550,2725) 5481.1,2725 cw(c5550,2725) 5550,2793.9 cw(c5550,2725) 5618.9,2725 cw(c5550,2725)
  pour cut-out: 7033.11,3325 ccw(c7102.05,3325) 7102.05,3256.06 ccw(c7102.05,3325) 7170.98,3325 ccw(c7102.05,3325) 7102.05,3393.94 ccw(c7102.05,3325)
  pour cut-out: 5550,4746.1 cw(c5550,4815) 5481.1,4815 cw(c5550,4815) 5550,4883.9 cw(c5550,4815) 5618.9,4815 cw(c5550,4815)
  pour cut-out: 7033.11,5370 ccw(c7102.05,5370) 7102.05,5301.06 ccw(c7102.05,5370) 7170.98,5370 ccw(c7102.05,5370) 7102.05,5438.94 ccw(c7102.05,5370)
  pour cut-out: 5550,6791.1 cw(c5550,6860) 5481.1,6860 cw(c5550,6860) 5550,6928.9 cw(c5550,6860) 5618.9,6860 cw(c5550,6860)
  pour cut-out: 7660,6761.1 cw(c7660,6830) 7591.1,6830 cw(c7660,6830) 7660,6898.9 cw(c7660,6830) 7728.9,6830 cw(c7660,6830)
  pour cut-out: 9143.11,5340 ccw(c9212.05,5340) 9212.05,5271.06 ccw(c9212.05,5340) 9280.98,5340 ccw(c9212.05,5340) 9212.05,5408.94 ccw(c9212.05,5340)
  pour cut-out: 7660,4716.1 cw(c7660,4785) 7591.1,4785 cw(c7660,4785) 7660,4853.9 cw(c7660,4785) 7728.9,4785 cw(c7660,4785)
  pour cut-out: 9143.11,3295 ccw(c9212.05,3295) 9212.05,3226.06 ccw(c9212.05,3295) 9280.98,3295 ccw(c9212.05,3295) 9212.05,3363.94 ccw(c9212.05,3295)
  pour cut-out: 7660,2626.1 cw(c7660,2695) 7591.1,2695 cw(c7660,2695) 7660,2763.9 cw(c7660,2695) 7728.9,2695 cw(c7660,2695)
  pour cut-out: 9143.11,1205 ccw(c9212.05,1205) 9212.05,1136.06 ccw(c9212.05,1205) 9280.98,1205 ccw(c9212.05,1205) 9212.05,1273.94 ccw(c9212.05,1205)
  pour cut-out: 4838.11,1240 ccw(c4907.05,1240) 4907.05,1171.06 ccw(c4907.05,1240) 4975.98,1240 ccw(c4907.05,1240) 4907.05,1308.94 ccw(c4907.05,1240)
  pour cut-out: 3355,2661.1 cw(c3355,2730) 3286.1,2730 cw(c3355,2730) 3355,2798.9 cw(c3355,2730) 3423.9,2730 cw(c3355,2730)
  pour cut-out: 4838.11,3330 ccw(c4907.05,3330) 4907.05,3261.06 ccw(c4907.05,3330) 4975.98,3330 ccw(c4907.05,3330) 4907.05,3398.94 ccw(c4907.05,3330)
  pour cut-out: 3355,4751.1 cw(c3355,4820) 3286.1,4820 cw(c3355,4820) 3355,4888.9 cw(c3355,4820) 3423.9,4820 cw(c3355,4820)
  pour cut-out: 4838.11,5375 ccw(c4907.05,5375) 4907.05,5306.06 ccw(c4907.05,5375) 4975.98,5375 ccw(c4907.05,5375) 4907.05,5443.94 ccw(c4907.05,5375)
  pour cut-out: 3355,6796.1 cw(c3355,6865) 3286.1,6865 cw(c3355,6865) 3355,6933.9 cw(c3355,6865) 3423.9,6865 cw(c3355,6865)
  pour cut-out: 1245,6826.1 cw(c1245,6895) 1176.1,6895 cw(c1245,6895) 1245,6963.9 cw(c1245,6895) 1313.9,6895 cw(c1245,6895)
  pour cut-out: 2728.11,5405 ccw(c2797.05,5405) 2797.05,5336.06 ccw(c2797.05,5405) 2865.98,5405 ccw(c2797.05,5405) 2797.05,5473.94 ccw(c2797.05,5405)
  pour cut-out: 1245,4781.1 cw(c1245,4850) 1176.1,4850 cw(c1245,4850) 1245,4918.9 cw(c1245,4850) 1313.9,4850 cw(c1245,4850)
  pour cut-out: 2728.11,3360 ccw(c2797.05,3360) 2797.05,3291.06 ccw(c2797.05,3360) 2865.98,3360 ccw(c2797.05,3360) 2797.05,3428.94 ccw(c2797.05,3360)
  pour cut-out: 1245,2691.1 cw(c1245,2760) 1176.1,2760 cw(c1245,2760) 1245,2828.9 cw(c1245,2760) 1313.9,2760 cw(c1245,2760)
  pour cut-out: 2728.11,1270 ccw(c2797.05,1270) 2797.05,1201.06 ccw(c2797.05,1270) 2865.98,1270 ccw(c2797.05,1270) 2797.05,1338.94 ccw(c2797.05,1270)
  text "japan" at 2105,5925 h60
  text "japan" at 4215,5895 h60
  text "japan" at 6410,5890 h60
  text "japan" at 8520,5860 h60
  text "2017.8.6" at 2030,5730 h60
  text "2017.8.6" at 4140,5700 h60
  text "2017.8.6" at 6335,5695 h60
  text "2017.8.6" at 8445,5665 h60
  text "japan" at 2105,3880 h60
  text "japan" at 4215,3850 h60
  text "japan" at 6410,3845 h60
  text "japan" at 8520,3815 h60
  text "2017.8.6" at 2030,3685 h60
  text "2017.8.6" at 4140,3655 h60
  text "2017.8.6" at 6335,3650 h60
  text "2017.8.6" at 8445,3620 h60
  text "japan" at 2105,1790 h60
  text "japan" at 4215,1760 h60
  text "japan" at 6410,1755 h60
  text "japan" at 8520,1725 h60
  text "2017.8.6" at 2030,1595 h60
  text "2017.8.6" at 4140,1565 h60
  text "2017.8.6" at 6335,1560 h60
  text "2017.8.6" at 8445,1530 h60

## Text inside footprints (layer, text, board x,y; h text height)
P2: Top Overlay "KF301" at 1265,1715 h60 r90
P2_1: Top Overlay "KF301" at 1265,3805 h60 r90
P2_1_1: Top Overlay "KF301" at 3375,3775 h60 r90
P2_1_1_1: Top Overlay "KF301" at 7680,3740 h60 r90
P2_1_2: Top Overlay "KF301" at 5570,3770 h60 r90
P2_2: Top Overlay "KF301" at 1265,5850 h60 r90
P2_2_1: Top Overlay "KF301" at 3375,5820 h60 r90
P2_2_1_1: Top Overlay "KF301" at 7680,5785 h60 r90
P2_2_2: Top Overlay "KF301" at 5570,5815 h60 r90
P2_3: Top Overlay "KF301" at 3375,1685 h60 r90
P2_3_1: Top Overlay "KF301" at 7680,1650 h60 r90
P2_4: Top Overlay "KF301" at 5570,1680 h60 r90
U1: Top Overlay "DEV" at 1745,2445 h50 r270; Top Overlay "PN" at 1745,2445 h50 r270; Top Overlay "VAL" at 1745,2445 h50 r270; Top Overlay "TOL" at 1745,2445 h50 r270; Top Overlay "u" at 1988,2785 h50 r270
U1_1: Top Overlay "DEV" at 1745,4535 h50 r270; Top Overlay "PN" at 1745,4535 h50 r270; Top Overlay "VAL" at 1745,4535 h50 r270; Top Overlay "TOL" at 1745,4535 h50 r270; Top Overlay "u" at 1988,4875 h50 r270
U1_1_1: Top Overlay "DEV" at 3855,4505 h50 r270; Top Overlay "PN" at 3855,4505 h50 r270; Top Overlay "VAL" at 3855,4505 h50 r270; Top Overlay "TOL" at 3855,4505 h50 r270; Top Overlay "u" at 4098,4845 h50 r270
U1_1_1_1: Top Overlay "DEV" at 8160,4470 h50 r270; Top Overlay "PN" at 8160,4470 h50 r270; Top Overlay "VAL" at 8160,4470 h50 r270; Top Overlay "TOL" at 8160,4470 h50 r270; Top Overlay "u" at 8403,4810 h50 r270
U1_1_2: Top Overlay "DEV" at 6050,4500 h50 r270; Top Overlay "PN" at 6050,4500 h50 r270; Top Overlay "VAL" at 6050,4500 h50 r270; Top Overlay "TOL" at 6050,4500 h50 r270; Top Overlay "u" at 6293,4840 h50 r270
U1_2: Top Overlay "DEV" at 1745,6580 h50 r270; Top Overlay "PN" at 1745,6580 h50 r270; Top Overlay "VAL" at 1745,6580 h50 r270; Top Overlay "TOL" at 1745,6580 h50 r270; Top Overlay "u" at 1988,6920 h50 r270
U1_2_1: Top Overlay "DEV" at 3855,6550 h50 r270; Top Overlay "PN" at 3855,6550 h50 r270; Top Overlay "VAL" at 3855,6550 h50 r270; Top Overlay "TOL" at 3855,6550 h50 r270; Top Overlay "u" at 4098,6890 h50 r270
U1_2_1_1: Top Overlay "DEV" at 8160,6515 h50 r270; Top Overlay "PN" at 8160,6515 h50 r270; Top Overlay "VAL" at 8160,6515 h50 r270; Top Overlay "TOL" at 8160,6515 h50 r270; Top Overlay "u" at 8403,6855 h50 r270
U1_2_2: Top Overlay "DEV" at 6050,6545 h50 r270; Top Overlay "PN" at 6050,6545 h50 r270; Top Overlay "VAL" at 6050,6545 h50 r270; Top Overlay "TOL" at 6050,6545 h50 r270; Top Overlay "u" at 6293,6885 h50 r270
U1_3: Top Overlay "DEV" at 3855,2415 h50 r270; Top Overlay "PN" at 3855,2415 h50 r270; Top Overlay "VAL" at 3855,2415 h50 r270; Top Overlay "TOL" at 3855,2415 h50 r270; Top Overlay "u" at 4098,2755 h50 r270
U1_3_1: Top Overlay "DEV" at 8160,2380 h50 r270; Top Overlay "PN" at 8160,2380 h50 r270; Top Overlay "VAL" at 8160,2380 h50 r270; Top Overlay "TOL" at 8160,2380 h50 r270; Top Overlay "u" at 8403,2720 h50 r270
U1_4: Top Overlay "DEV" at 6050,2410 h50 r270; Top Overlay "PN" at 6050,2410 h50 r270; Top Overlay "VAL" at 6050,2410 h50 r270; Top Overlay "TOL" at 6050,2410 h50 r270; Top Overlay "u" at 6293,2750 h50 r270